# Altium PCB FSR_Array_PCBV2.PcbDoc
Units mm, origin at the board's own origin, x right, y up, seen from the top; angles counter-clockwise.
Board outline 60 x 60 mm, 2 copper layers (Top Layer, Bottom Layer); 30 components, 36 nets, 162 pads, 45 vias.
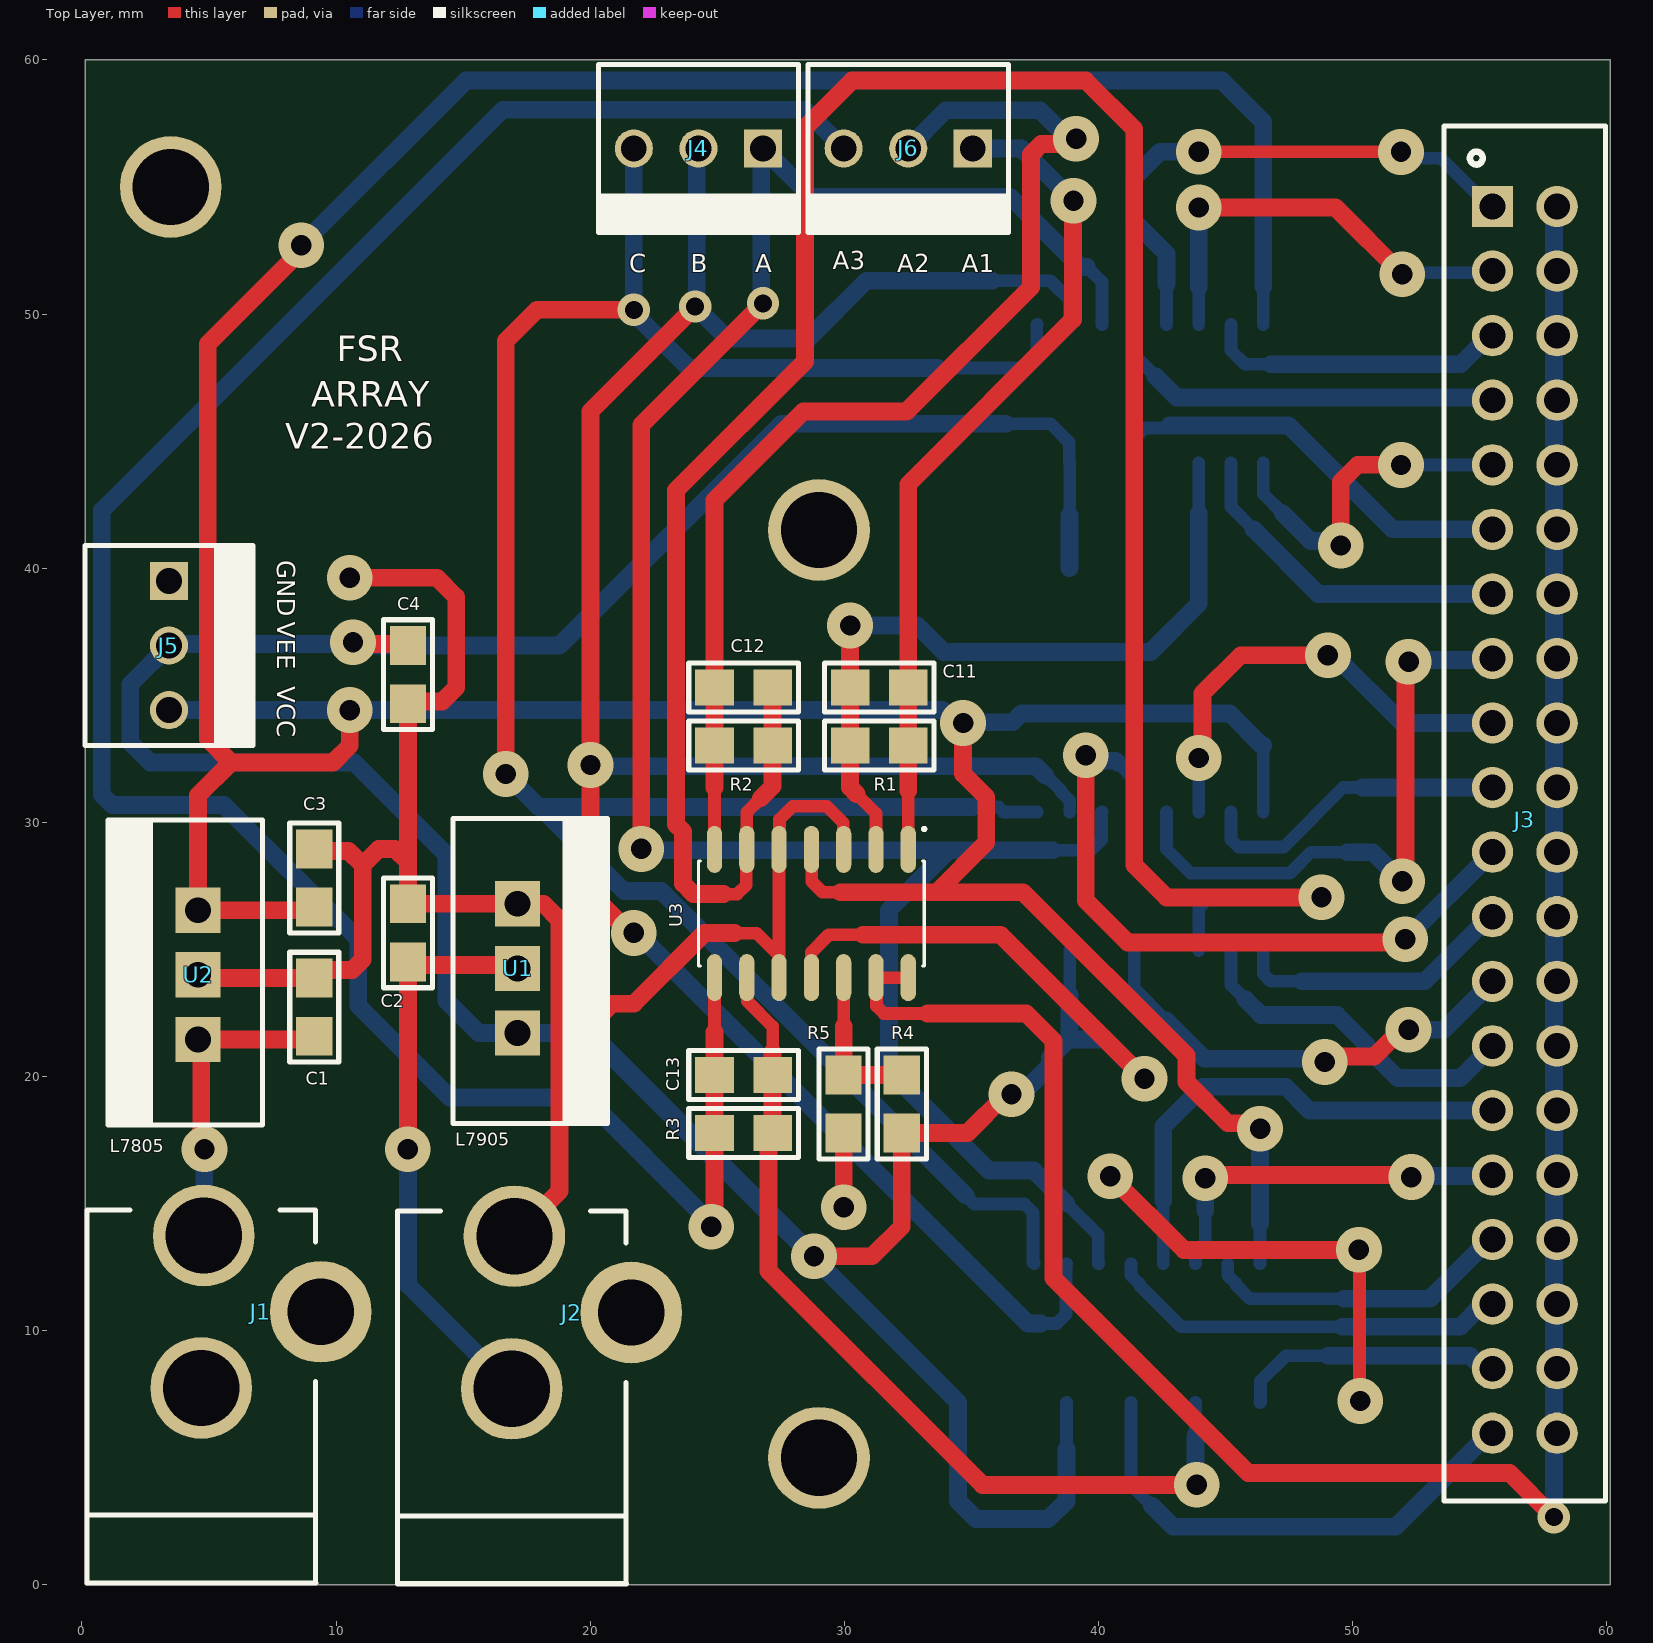
[diagram p0: Top Layer view]
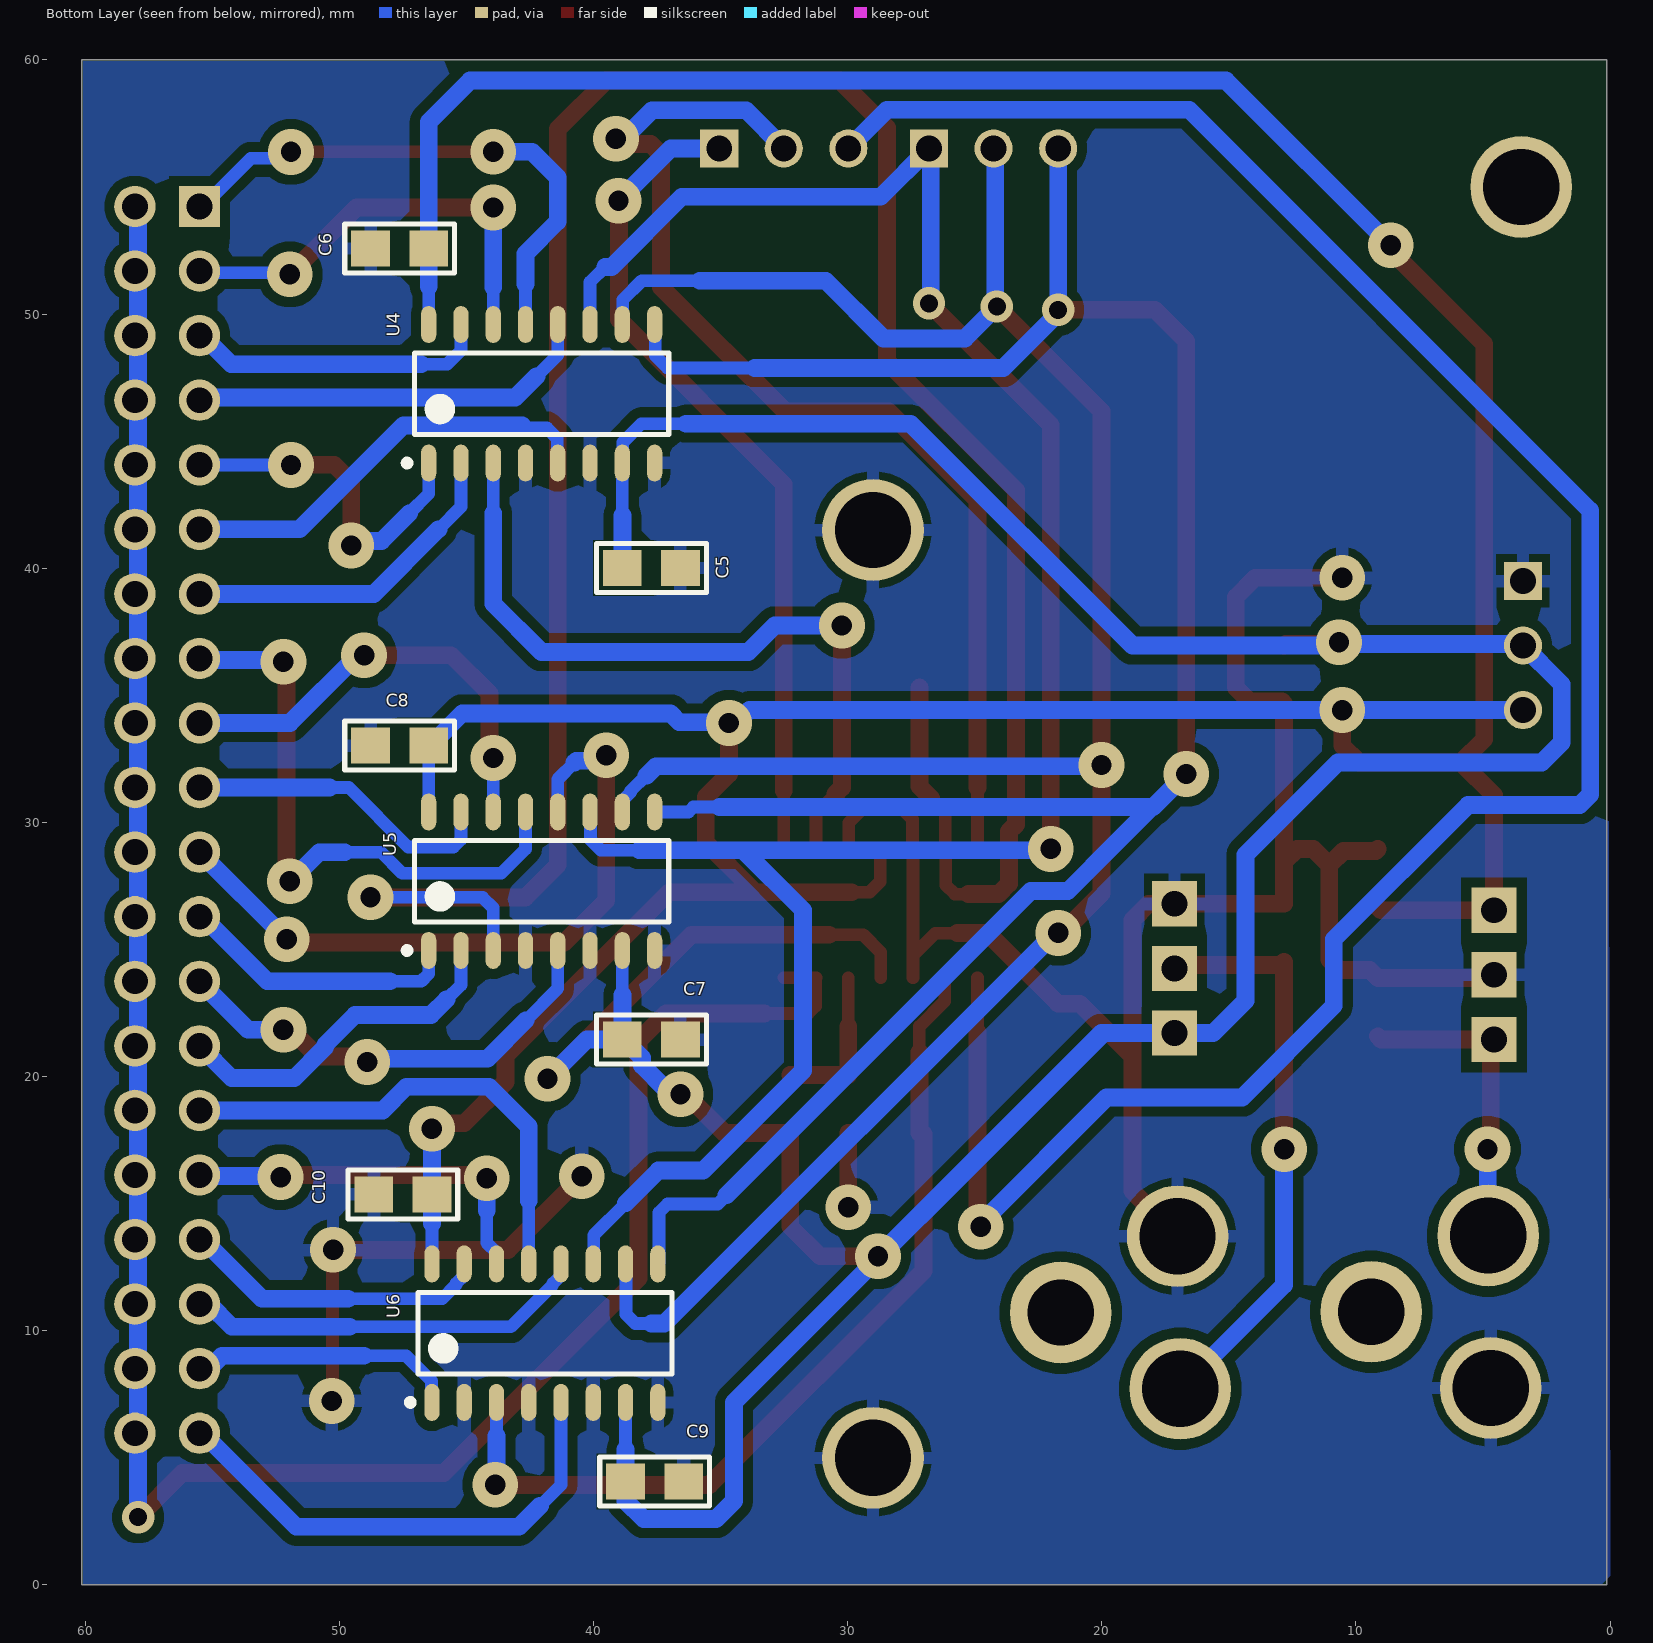
[diagram p1: Bottom Layer view, seen from below]

## Layer stack, top to bottom
Top Solder: solder mask 0.0102, Solder Resist, Dk 3.5
Top Layer: signal copper 0.0356
Dielectric 1: dielectric 0.32, FR-4, Dk 4.8
Bottom Layer: signal copper 0.0356
Bottom Solder: solder mask 0.0102, Solder Resist, Dk 3.5

## Board outline
0.127,0 0.127,60 60.127,60 60.127,0

## Design rules (kind name [scope] priority, off if disabled: settings)
Clearance [All] p1: gap=0.4 ignorepadtopadclearanceinfootprint=FALSE
PolygonConnect [All] p1: connectstyle=Relief reliefconductorwidth=0.5 reliefentries=4 polygonreliefangle="90 Angle" airgapwidth=0.3
RoutingVias [All] p1: holewidth=0.8 width=1.8 viastyle="Through Hole" minholewidth=0.8 minwidth=1.8 maxholewidth=0.8 maxwidth=1.8
SolderMaskExpansion [All] p1: expansion=0 istentingtop=FALSE
SupplyNets "Schematic Supply Nets_3" [InNet('-5')] p1: voltage=0.000
SupplyNets "Schematic Supply Nets_2" [InNet('GND')] p2: voltage=0.000
SupplyNets "Schematic Supply Nets_1" [InNet('+5')] p3: voltage=0.000
SupplyNets "Schematic Supply Nets" [InNet('-0.88')] p4: voltage=0.000
Width [All] p1: maxlimit=0.7 minlimit=0.5 preferedwidth=0.7
30 further rules are at their usual default settings.

## Components (designator, comment, footprint, x,y, rotation, side; value= is the part's Value field where it differs from the comment)
C1 "330n" 0805 9.144,22.733 r90 top
C2 "330n" 0805 12.827,25.654 r270 top
C3 "100n" 0805 9.144,27.813 r90 top
C4 "100n" 0805 12.827,35.814 r90 top
C5 "100n" 0805 37.719,40.005 r180 bottom
C6 "100n" 0805 47.625,52.578 r0 bottom
C7 "100n" 0805 37.719,21.463 r180 bottom
C8 "100n" 0805 47.625,33.02 r0 bottom
C9 "100n" 0805 37.592,4.064 r180 bottom
C10 "100n" 0805 47.498,15.367 r0 bottom
C11 "1n" 0805 31.369,35.306 r0 top
C12 "1n" 0805 26.035,35.306 r180 top
C13 "1n" 0805 26.035,20.066 r180 top
J1 "JACKDC" JACKDC 4.699,13.747 r270 top
J2 "JACKDC" JACKDC 16.916,13.716 r270 top
J3 "CON20*2" SIP20*2 53.594,57.404 r270 top
J4 "MOLEX3" MOLEX3 26.797,56.515 r180 top
J5 "MOLEX3" MOLEX3 3.429,39.497 r270 top
J6 "MOLEX3" MOLEX3 35.052,56.515 r180 top
R1 "1k" 0805 31.369,33.02 r180 top
R2 "1k" 0805 26.035,33.02 r0 top
R3 "1k" 0805 26.035,17.78 r0 top
R4 "4K7" 0805 32.258,18.923 r90 top
R5 "1K" 0805 29.972,18.923 r90 top
U1 "L7905" "TO-220 V" 17.145,24.257 r270 top
U2 "L7805" "TO-220 V" 4.572,24.003 r90 top
U3 "TL084" SOIC-14 28.702,26.416 r270 top
U4 "CD4051" CD4051 42.037,46.863 r90 bottom
U5 "CD4051" CD4051 42.037,27.686 r90 bottom
U6 "CD4051" CD4051 41.91,9.906 r90 bottom

## Footprints (in the part's own frame and the unit in brackets; to place one, negate y for a bottom-side part, rotate by r counter-clockwise, add the part's x,y. Pads: shape width x height; smd on the part's side, far side on the other; paste and mask are expansions set on the pad)
0805 [mil] "Pasivo 0805"
  rect 60x56 smd: 1(-45,0) 2(45,0)
  silkscreen extent -85,-38 85,38, body extent -40,-25 39,25, height 15
CD4051 [mm] "SOP, 16-Leads, Body 9,90x3,90mm, Pitch 1,27mm, IPC Medium Density"
  oval 1.45x0.6 smd: 1(-2.725,4.445) 2(-2.725,3.175) 3(-2.725,1.905) 4(-2.725,0.635) 5(-2.725,-0.635) 6(-2.725,-1.905) 7(-2.725,-3.175) 8(-2.725,-4.445) 9(2.725,-4.445) 10(2.725,-3.175) 11(2.725,-1.905) 12(2.725,-0.635) 13(2.725,0.635) 14(2.725,1.905) 15(2.725,3.175) 16(2.725,4.445)
  silkscreen extent -2.85,-5 1.6,5.42, body extent -2,-5 2,5, height 1.75
JACKDC [mm]
  round 4 hole 3: 1(0,0.102) 2(6,0)
  round 4 hole 2.6: 3(3,4.7)
  silkscreen extent -1,-4.5 13.67,4.5, body extent -0.16,-4.5 13.67,5.01, height 11
MOLEX3 [mm]
  rect 1.5x1.5 hole 1.016: 1(0,0)
  round 1.5 hole 1.016: 2(2.54,0) 3(5.08,0)
  silkscreen extent -1.4,-3.3 6.48,3.3, body extent -1.27,-3.17 6.35,3.18, height 10.74
SIP20*2 [mil]
  rect 64.02x64.02 hole 40: 1(125,75)
  round 64.02 hole 40: 2(225,75) 3(325,75) 4(425,75) 5(525,75) 6(625,75) 7(725,75) 8(825,75) 9(925,75) 10(1025,75) 11(1125,75) 12(1225,75) 13(1325,75) 14(1425,75) 15(1525,75) 16(1625,75) 17(1725,75) 18(1825,75) 19(1925,75) 20(2025,75) 21(2025,175) 22(1925,175) 23(1825,175) 24(1725,175) 25(1625,175) 26(1525,175) 27(1425,175) 28(1325,175) 29(1225,175) 30(1125,175) 31(1025,175) 32(925,175) 33(825,175) 34(725,175) 35(625,175) 36(525,175) 37(425,175) 38(325,175) 39(225,175) 40(125,175)
  silkscreen extent 0,0 2130,250, body extent 75,24 2075,224, height 398
SOIC-14 [mm] "SOIC, 14-Leads, Body 8.65x3.90mm, Pitch 1.27mm, IPC Medium Density"
  oval 1.85x0.6 smd: 1(-2.525,3.81) 2(-2.525,2.54) 3(-2.525,1.27) 4(-2.525,0) 5(-2.525,-1.27) 6(-2.525,-2.54) 7(-2.525,-3.81) 8(2.525,-3.81) 9(2.525,-2.54) 10(2.525,-1.27) 11(2.525,0) 12(2.525,1.27) 13(2.525,2.54) 14(2.525,3.81)
  silkscreen extent -3.39,-4.44 2.06,4.5, body extent -3,-4.33 3,4.33, height 2.65
"TO-220 V" [mil]
  rect 70x70 hole 40: 1(-100,0) 2(0,0) 3(100,0)
  silkscreen extent -232,-100 240,139, body extent -197,-79 197,118, height 709

## Part data
C1 C2 C3 C4 C5 C6 C7 C8 C9 C10 C11 C12 C13: library part CAP
R1 R2 R3 R4 R5: library part RES
U1: library part LM7905

## Free pads (board coordinates)
  round 4 hole 3: 2(3.5,55) 2(29,5) 2(29,41.5)

## Via types
v1: diameter 1.8, hole 0.8, Top Layer to Bottom Layer, 41 vias
v2: diameter 1.27, hole 0.711, Top Layer to Bottom Layer, 4 vias

## Nets (pads, with @x,y where several pads share a name; then routed paths per layer and width w, separated by ;. In a path a pad name is that pad's centre, name@x,y a point inside that pad or via, vN(x,y) a via of type N, cw(c..) or ccw(c..) an arc to the next point about the centre after c; other vN are vias at no path point)
+5: C3.1 C6.1 C8.1 C10.1 J5.3 U2.3 U3.4 U4.16 U5.16 U6.16 | length 171.9
  Top Layer w0.5: U3.4 28.721,28.922 28.721,27.667 29.134,27.254 29.845,27.254
  Top Layer w0.7: v1(8.636,52.705) 8.636,52.5 4.953,48.817 4.953,33.274 5.867,32.36 ; C3.1 9.017,26.543 U2.3 4.572,31.064 5.867,32.36 ; v1(10.541,34.417) 10.541,33.02 9.881,32.36 5.867,32.36 ; 29.845,27.254 33.63,27.254 ; v1(34.671,33.909) 34.671,31.909 35.585,30.995 35.585,29.21 33.63,27.254 ; v1(46.355,17.951) 46.145,18.161 45.085,18.161 43.458,19.788 43.458,20.825 37.03,27.254 33.63,27.254
  Bottom Layer w0.5: U6.16 46.355,14.224 ; U5.16 C8.1 ; U4.16 46.482,51.083
  Bottom Layer w0.7: J5.3 v1(10.541,34.417) 33.865,34.417 34.373,33.909 v1(34.671,33.909) ; v1(8.636,52.705) 15.113,59.182 44.856,59.182 46.482,57.556 C6.1 46.482,51.083 ; v1@34.724,33.939 36.621,33.939 36.971,34.289 45.162,34.289 46.431,33.02 C8.1 ; 46.355,14.224 C10.1 v1(46.355,17.951)
-0.88: J3.21 J3.22 J3.23 J3.24 J3.25 J3.26 J3.27 J3.28 J3.29 J3.30 J3.31 J3.32 J3.33 J3.34 J3.35 J3.36 J3.37 J3.38 J3.39 J3.40 U3.13 U3.14 | length 94.4
  Top Layer w0.5: U3.14 U3.13 31.261,23.872 31.261,22.772 31.554,22.479 33.274,22.479
  Top Layer w0.7: 33.274,22.479 37.153,22.479 38.227,21.405 38.227,12.065 45.886,4.406 56.173,4.406 v2(57.912,2.667)
  Bottom Layer w0.7: v2(57.912,2.667) 57.912,8.509 57.912,11.049 57.912,13.589 57.912,16.129 57.912,18.669 57.912,21.209 57.912,23.749 57.912,26.289 57.912,28.829 57.912,31.369 57.912,33.909 57.912,36.449 57.912,38.989 57.912,41.529 57.912,44.069 57.912,46.609 57.912,49.149 57.912,51.689 J3.40@57.912,54.229
-5: C4.2 C5.1 C7.1 C9.1 J5.2 R4.1 U1.3 U3.11 U4.7 U5.7 U6.7 | length 162.6
  Top Layer w0.5: U3.11 28.702,24.892 29.388,25.578 30.734,25.578
  Top Layer w0.7: v1(10.668,37.084) 10.731,37.02 12.763,37.02 C4.2 ; v1(28.804,12.929) 31.09,12.929 32.258,14.097 R4.1 34.848,17.78 36.372,19.304 v1(36.577,19.304) ; 30.734,25.578 36.144,25.578 v1(41.808,19.914)
  Bottom Layer w0.5: 36.355,45.687 38.109,45.687 38.843,44.954 38.843,44.157 U4.7 38.862,42.071 ; 38.735,5.334 U6.7 ; 38.862,23.212 U5.7
  Bottom Layer w0.7: v1(28.804,12.929) 20.015,21.717 19.934,21.717 ; 36.355,45.687 27.526,45.687 18.796,36.957 10.795,36.957 v1(10.668,37.084) 10.604,37.02 3.492,37.02 1.905,35.433 1.905,33.147 2.692,32.36 10.719,32.36 14.351,28.727 14.351,22.987 15.621,21.717 U1.3 19.934,21.717 ; v1(36.577,19.304) 36.787,19.514 37.161,19.514 38.088,20.441 38.088,20.74 38.811,21.463 C7.1 ; 38.735,5.334 C9.1 38.735,3.302 38.024,2.591 35.179,2.591 34.468,3.302 34.468,7.184 19.934,21.717 ; 38.862,23.212 C7.1 ; C5.1 38.862,42.071 ; v1(41.808,19.914) 40.259,21.463 C7.1
ADC1: C11.2 J6.1 R1.1 U3.1 | length 33
  Top Layer w0.5: U3.1 32.512,31.242
  Top Layer w0.7: 32.512,31.242 R1.1 C11.2 32.512,43.307 38.989,49.784 38.989,54.436 v1(39.013,54.459)
  Bottom Layer w0.7: J6.1 36.957,56.515 v1(39.013,54.459)
ADC2: C12.2 J6.2 R2.1 U3.7 | length 44.6
  Top Layer w0.5: U3.7 24.892,31.369
  Top Layer w0.7: 24.892,31.369 R2.1 C12.2 24.892,42.672 28.384,46.164 32.448,46.164 37.338,51.054 37.338,56.275 37.748,56.686 38.906,56.686 v1(39.116,56.896)
  Bottom Layer w0.7: J6.2 32.512,56.536 33.991,58.015 37.699,58.015 38.818,56.896 v1(39.116,56.896)
ADC3: C13.2 J6.3 R3.1 U3.8 | length 89.9
  Top Layer w0.5: 24.892,21.742 U3.8
  Top Layer w0.7: v1(24.765,14.097) 24.892,14.224 R3.1 C13.2 24.892,21.742
  Bottom Layer w0.7: v1@24.638,14.097 24.638,14.351 19.812,19.177 14.478,19.177 10.871,22.784 10.871,25.4 5.588,30.683 1.2,30.683 0.787,31.096 0.787,42.266 16.561,58.039 28.448,58.039 J6.3
CH1: J3.1 U4.13 | length 21.6
  Top Layer w0.5: v1(43.942,56.388) 43.947,56.383 51.892,56.383 v1(51.897,56.379)
  Bottom Layer w0.5: U4.13 42.672,51.181 ; v1(51.897,56.379) 52.146,56.13 53.471,56.13 J3.1@55.372,54.229
  Bottom Layer w0.7: 42.672,51.181 42.672,52.375 41.402,53.645 41.402,55.372 42.418,56.388 v1(43.942,56.388)
CH2: J3.2 U4.14 | length 17.2
  Top Layer w0.7: v1(43.942,54.188) 49.317,54.188 v1(51.943,51.562)
  Bottom Layer w0.5: U4.14 43.942,51.054 ; v1(51.943,51.562) 52.006,51.625 55.308,51.625 J3.2@55.372,51.689
  Bottom Layer w0.7: 43.942,51.054 v1(43.942,54.188)
CH3: J3.3 U4.15 | length 11.9
  Bottom Layer w0.5: U4.15 45.212,48.571 45.756,48.026 46.774,48.026
  Bottom Layer w0.7: 46.774,48.026 54.249,48.026 J3.3@55.372,49.149
CH4: J3.4 U4.12 | length 15.9
  Bottom Layer w0.5: U4.12 41.402,48.387 42.239,47.55
  Bottom Layer w0.7: 42.239,47.55 43.076,46.713 55.268,46.713 J3.4@55.372,46.609
CH5: J3.5 U4.1 | length 13.7
  Top Layer w0.7: v1(49.53,40.894) 49.53,43.405 50.194,44.069 v1@51.897,44.069
  Bottom Layer w0.5: U4.1 46.482,42.926 47.244,42.164 ; v1(51.897,44.06) 51.902,44.064 55.367,44.064 J3.5@55.372,44.069
  Bottom Layer w0.7: 47.244,42.164 48.343,41.065 49.359,41.065 v1(49.53,40.894)
CH6: J3.6 U4.5 | length 16.8
  Bottom Layer w0.5: U4.5@41.421,44.157 41.421,45.104 41.83,45.513 42.699,45.513 42.799,45.613
  Bottom Layer w0.7: 42.799,45.613 47.478,45.613 51.562,41.529 J3.6@55.372,41.529
CH7: J3.7 U4.2 | length 13.3
  Bottom Layer w0.5: U4.2 45.212,42.418 46.101,41.529
  Bottom Layer w0.7: 46.101,41.529 48.641,38.989 J3.7@55.372,38.989
CH8: J3.8 U5.13 | length 24
  Top Layer w0.7: v1(51.943,27.686) 52.07,27.813 52.07,36.195 v1(52.197,36.322)
  Bottom Layer w0.5: U5.13 42.672,28.956 43.633,27.995 47.519,27.995 48.354,28.829 49.784,28.829
  Bottom Layer w0.7: 49.784,28.829 50.787,28.829 51.93,27.686 v1(51.943,27.686) ; v1(52.197,36.322) 52.261,36.386 55.435,36.386 J3.8
CH9: J3.9 U5.14 | length 17.7
  Top Layer w0.7: v1(43.942,32.531) 44.085,32.674 44.085,35.068 45.593,36.576 v1(49.022,36.576)
  Bottom Layer w0.5: U5.14 v1(43.942,32.531)
  Bottom Layer w0.7: v1(49.022,36.576) 49.276,36.576 51.943,33.909 J3.9@55.372,33.909
CH10: J3.10 U5.15 | length 12.3
  Bottom Layer w0.5: U5.15 45.212,29.329 45.505,29.036 47.288,29.036 49.621,31.369 50.387,31.369
  Bottom Layer w0.7: 50.387,31.369 J3.10@55.372,31.369
CH11: J3.11 U5.12 | length 27.5
  Top Layer w0.7: v1(39.497,32.639) 39.497,26.924 41.148,25.273 51.943,25.273 v1(52.07,25.4)
  Bottom Layer w0.5: 40.742,32.36 41.402,31.699 U5.12
  Bottom Layer w0.7: v1(39.497,32.639) 39.707,32.429 40.673,32.429 40.742,32.36 ; v1(52.07,25.4) J3.11
CH12: J3.12 U5.1 | length 11
  Bottom Layer w0.5: U5.1 46.482,24.043 46.775,23.75 48.005,23.75
  Bottom Layer w0.7: 48.005,23.75 52.833,23.75 J3.12@55.372,26.289
CH13: J3.13 U5.5 | length 18.1
  Top Layer w0.7: v1(48.895,20.574) 49.105,20.784 50.84,20.784 51.899,21.844 v1(52.197,21.844)
  Bottom Layer w0.5: U5.5 41.402,23.47 42.659,22.212
  Bottom Layer w0.7: 42.659,22.212 44.171,20.701 48.768,20.701 v1(48.895,20.574) ; v1(52.197,21.844) 53.594,21.844 J3.13
CH14: J3.14 U5.2 | length 13.7
  Bottom Layer w0.5: U5.2 45.212,23.606 45.775,23.042
  Bottom Layer w0.7: 45.775,23.042 46.391,22.427 49.375,22.427 50.547,21.255 50.547,21.161 51.769,19.939 54.229,19.939 J3.14
CH15: J3.15 U6.13 | length 19.3
  Bottom Layer w0.5: U6.13 42.545,15.113
  Bottom Layer w0.7: 42.545,15.113 42.545,18.034 44.112,19.601 47.36,19.601 48.292,18.669 J3.15@55.372,18.669
CH16: J3.16 U6.14 | length 14.9
  Top Layer w0.7: v1(44.196,16.002) 44.323,16.129 v1@52.307,16.129
  Bottom Layer w0.5: U6.14 43.815,13.079 44.195,13.459 44.195,14.731
  Bottom Layer w0.7: 44.195,14.731 v1(44.196,16.002) v1(44.196,16.002) ; v1(52.307,16.046) 52.349,16.087 55.457,16.087 J3.16
CH17: J3.17 U6.15 | length 12.1
  Bottom Layer w0.5: U6.15 45.085,12.179 45.405,11.859 45.405,11.813 45.961,11.256 46.749,11.256 46.752,11.26 49.657,11.26
  Bottom Layer w0.7: 49.657,11.26 53.043,11.26 J3.17@55.372,13.589
CH18: J3.18 U6.12 | length 15.8
  Bottom Layer w0.5: U6.12 41.275,12.179 41.595,11.859 41.595,11.813 43.248,10.16 49.594,10.16
  Bottom Layer w0.7: 49.594,10.16 54.232,10.16 55.121,11.049 J3.18@55.372,11.049
CH19: J3.19 U6.1 | length 10.5
  Bottom Layer w0.5: U6.1 46.374,7.2 46.374,8.02 47.371,9.017 49.022,9.017
  Bottom Layer w0.7: 49.022,9.017 54.613,9.017 55.121,8.509 J3.19@55.372,8.509
CH20: J3.20 U6.5 | length 19.5
  Bottom Layer w0.5: U6.5 41.275,3.937 42.099,3.113
  Bottom Layer w0.7: 42.099,3.113 42.924,2.288 51.691,2.288 J3.20@55.372,5.969
GND: C1.2 C2.1 C3.2 C4.1 C5.2 C6.2 C7.2 C8.2 C9.2 C10.2 J1.2 J2.1 J5.1 pad.2@29,5 pad.2@29,41.5 R5.1 U1.1 U2.2 U3.3 U3.5 U3.10 U4.4 U4.6 U4.8 U5.4 U5.6 U5.8 U6.2 U6.4 U6.6 U6.8 | length 94.4
  Top Layer w0.5: 25.678,25.645 26.548,25.645 27.413,24.78 27.413,23.91 U3.10 U3.5 27.451,28.96 27.451,30.118 27.965,30.632 29.312,30.632 29.953,29.991 29.953,28.96 U3.3 ; v1(50.241,13.183) 50.267,13.157 50.267,7.264 v1(50.292,7.239)
  Top Layer w0.7: U2.2 4.699,23.876 C1.2 9.461,24.193 10.639,24.193 11.049,24.603 11.049,28.321 ; C3.2 9.225,28.875 10.495,28.875 11.049,28.321 ; v1(10.541,39.624) 13.97,39.624 14.732,38.862 14.732,35.306 14.178,34.752 12.908,34.752 C4.1 ; C4.1@12.827,34.544 12.827,28.448 ; J2.1 18.796,15.494 18.796,20.803 ; 25.678,25.645 24.502,25.645 21.719,22.862 20.855,22.862 18.796,20.803 ; v1(29.972,14.859) R5.1 ; v1(40.462,16.078) 43.358,13.183 v1(50.241,13.183) ; 11.049,28.321 11.684,28.956 12.319,28.956 12.827,28.448 ; 12.827,28.448 C2.1 U1.1 18.161,26.797 18.796,26.162 18.796,20.803
IN_A: J4.1 U4.11 U5.11 U6.11 | length 87.9
  Top Layer w0.7: v1(22.007,28.957) 22.012,28.962 22.012,45.634 v2(26.797,50.419)
  Bottom Layer w0.5: 38.196,28.905 39.7,28.905 40.113,29.318 40.113,30.392 U5.11 ; 38.726,15.021 39.986,13.761 39.986,12.65 U6.11 ; 39.535,51.854 40.132,51.257 U4.11
  Bottom Layer w0.7: v1(22.007,28.957) 22.058,28.905 34.112,28.905 ; v2(26.797,50.419) 26.733,50.482 26.733,56.451 J4.1 28.702,54.61 36.529,54.61 39.284,51.854 39.535,51.854 ; 38.196,28.905 34.112,28.905 ; 38.726,15.021 37.446,16.3 35.692,16.3 31.75,20.242 31.75,26.543 34.112,28.905
IN_B: J4.2 U4.10 U5.10 U6.10 | length 96.3
  Top Layer w0.7: v1(21.717,25.653) 21.566,25.653 20.015,27.204 v1(20.015,32.257) 20.015,46.177 v2(24.13,50.292)
  Bottom Layer w0.5: 35.814,51.308 38.1,51.308 38.843,50.565 U4.10@38.843,49.607 ; 37.719,10.287 38.354,10.287 38.716,10.649 38.716,12.612 U6.10 ; 37.909,31.837 37.934,31.837 38.542,31.23 38.542,31.183 38.862,30.863 U5.10
  Bottom Layer w0.7: v1(20.015,32.257) 20.066,32.206 37.54,32.206 37.909,31.837 ; v1(21.717,25.653) 21.845,25.653 37.211,10.287 37.719,10.287 ; J4.2 24.194,56.451 24.194,50.355 v2(24.13,50.292) 25.388,49.034 28.587,49.034 30.861,51.308 35.814,51.308
IN_C: J4.3 U4.9 U5.9 U6.9 | length 96.6
  Top Layer w0.7: v1(16.681,31.907) 16.681,48.939 17.907,50.165 v2(21.717,50.165)
  Bottom Layer w0.5: 33.655,47.879 37.084,47.879 37.573,48.368 37.573,49.569 U4.9 ; 34.764,15.333 35.11,14.986 37.084,14.986 37.419,14.651 37.419,12.677 U6.9 ; 35.041,30.607 36.068,30.607 36.264,30.411 U5.9
  Bottom Layer w0.7: v1(16.681,31.907) 17.981,30.607 ; v2@21.717,50.038 23.876,47.879 33.655,47.879 ; v2(21.717,50.165) J4.3 ; 34.764,15.333 22.793,27.303 21.338,27.303 21.334,27.307 21.323,27.307 20.357,28.274 20.357,28.284 18.034,30.607 35.041,30.607
NetC1_1: C1.1 J1.1 U2.1 | length 12.5
  Top Layer w0.7: v1(4.826,17.145) 4.699,17.272 4.699,21.336 U2.1 9.017,21.463 C1.1
  Bottom Layer w0.7: J1.1 4.813,13.76 4.813,17.132 v1(4.826,17.145)
NetC2_2: C2.2 J2.2 U1.2 | length 22.9
  Top Layer w0.7: v1(12.827,17.145) C2.2 12.954,24.384 17.018,24.384 U1.2
  Bottom Layer w0.7: v1(12.827,17.145) 12.827,11.805 J2.2
NetC11_1: C11.1 R1.2 U3.2 U4.3 | length 29.7
  Top Layer w0.5: 30.48,31.115 31.242,30.353 U3.2
  Top Layer w0.7: v1(30.226,37.744) C11.1 R1.2 30.226,31.369 30.48,31.115
  Bottom Layer w0.5: 43.942,42.164 U4.3
  Bottom Layer w0.7: v1(30.226,37.744) 32.868,37.744 33.909,36.703 42.045,36.703 43.942,38.6 43.942,42.164
NetC12_1: C12.1 R2.2 U3.6 U5.3 | length 101
  Top Layer w0.5: 25.239,27.178 25.781,27.178 26.143,27.54 26.143,28.922 U3.6 26.162,30.404 26.708,30.95
  Top Layer w0.7: 25.239,27.178 24.067,27.178 23.657,27.588 23.657,29.64 23.38,29.917 23.38,43.065 28.448,48.133 28.448,57.328 30.302,59.182 39.497,59.182 41.402,57.277 41.402,28.321 42.672,27.051 v1(48.768,27.051) ; 26.708,30.95 27.178,31.42 R2.2 C12.1
  Bottom Layer w0.5: U5.3 43.942,26.631 44.362,27.051 v1(48.768,27.051)
NetC13_1: C13.1 R3.2 U3.9 U6.3 | length 35.6
  Top Layer w0.5: U3.9 26.181,23.872 26.181,22.968 27.178,21.971 27.178,20.955
  Top Layer w0.7: R3.2@27.051,17.78 27.015,17.744 27.015,12.355 35.432,3.938 v1(43.866,3.938) ; R3.2 C13.1 27.178,20.955
  Bottom Layer w0.5: 43.815,5.864 U6.3
  Bottom Layer w0.7: 43.815,5.864 43.815,3.989 v1(43.866,3.938)
NetR4_2: R4.2 R5.2 U3.12 | length 6.1
  Top Layer w0.5: 29.972,21.971 U3.12
  Top Layer w0.7: 29.972,21.971 R5.2 R4.2
pads on no net: J1.3 J2.3

## Polygon pours and split planes (outlines as drawn)
GND on Bottom Layer "GND_L02_P002" (solid, remove dead copper, pour order 2): 0.127,59.944 60.071,59.944 60.071,0 0,0

## Silkscreen, mask and mechanical layers (free items; w line width, h text height)
Top Overlay:
  text "A3" at 29.537,51.762 h0.7
  text "C" at 21.536,51.635 h0.7
  text "B" at 23.949,51.635 h0.7
  text "A" at 26.489,51.635 h0.7
  text "A2" at 32.077,51.635 h0.7
  text "A1" at 34.617,51.635 h0.7
  text "FSR" at 10.033,48.133 h1
  text "ARRAY" at 9.017,46.355 h1
  text "V2-2026" at 8.001,44.704 h1
  text "GND" at 7.693,40.313 h0.7 r270
  text "VEE" at 7.693,37.9 h0.7 r270
  text "VCC" at 7.693,35.36 h0.7 r270
Mechanical 13:
  the board outline again, w0.254